# EAGLE board spi-interface-TFML (EAGLE 6.5.0)
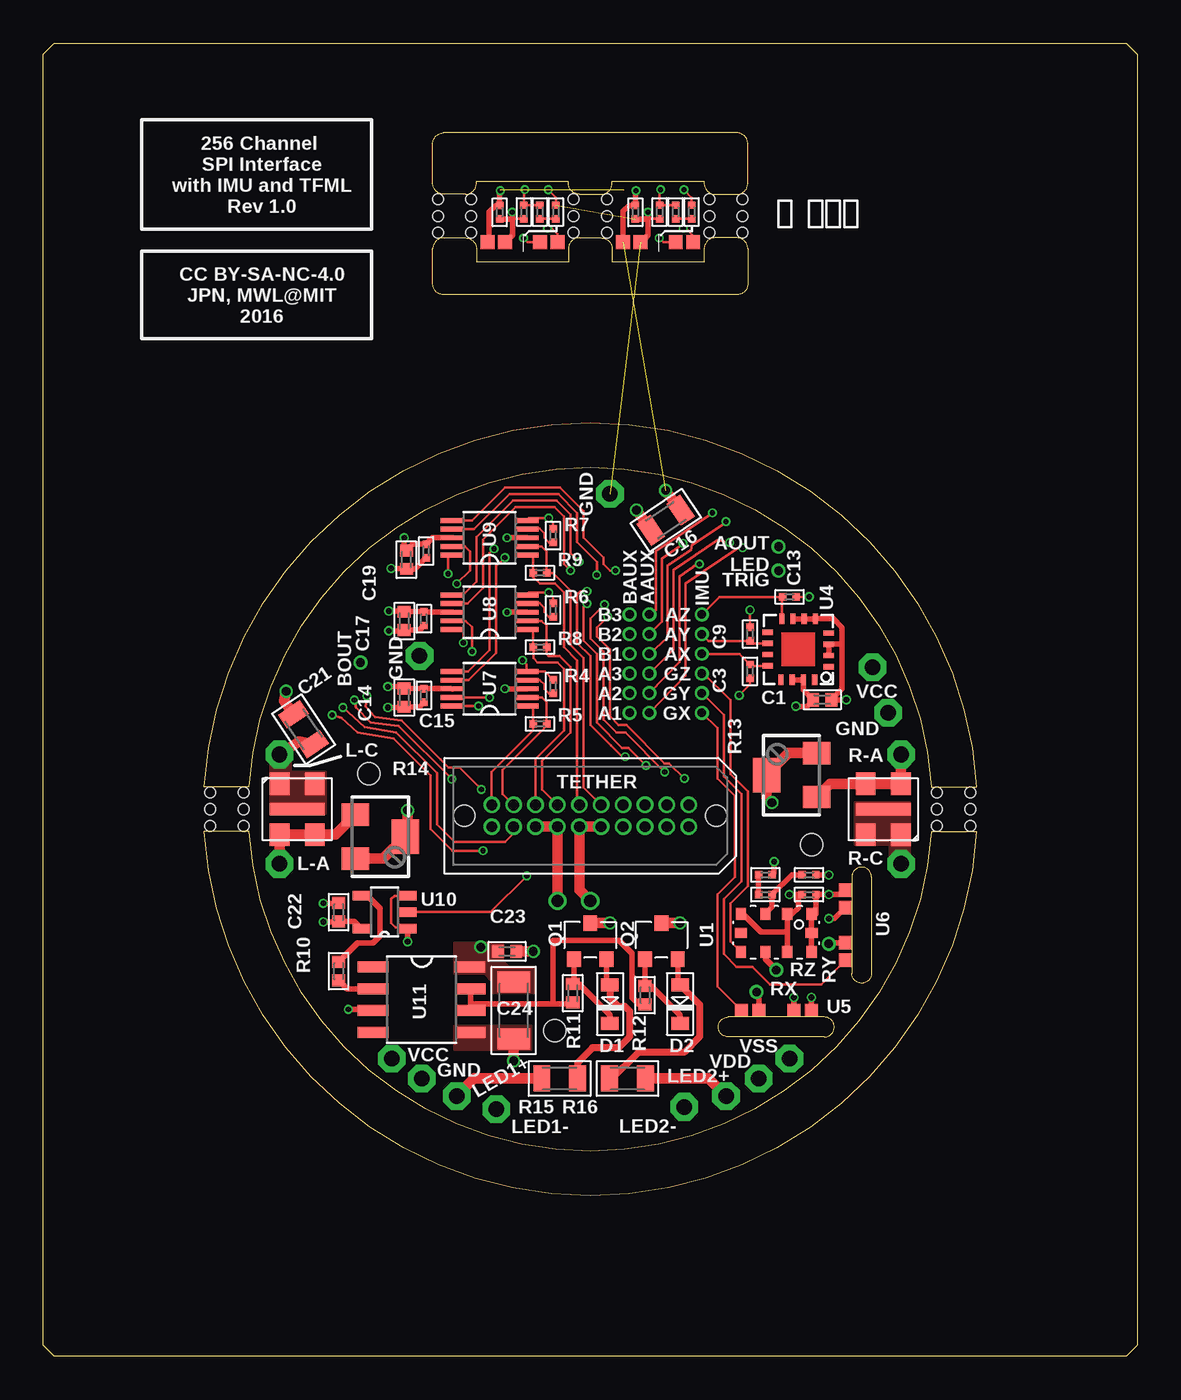
[diagram p0: board, top side]
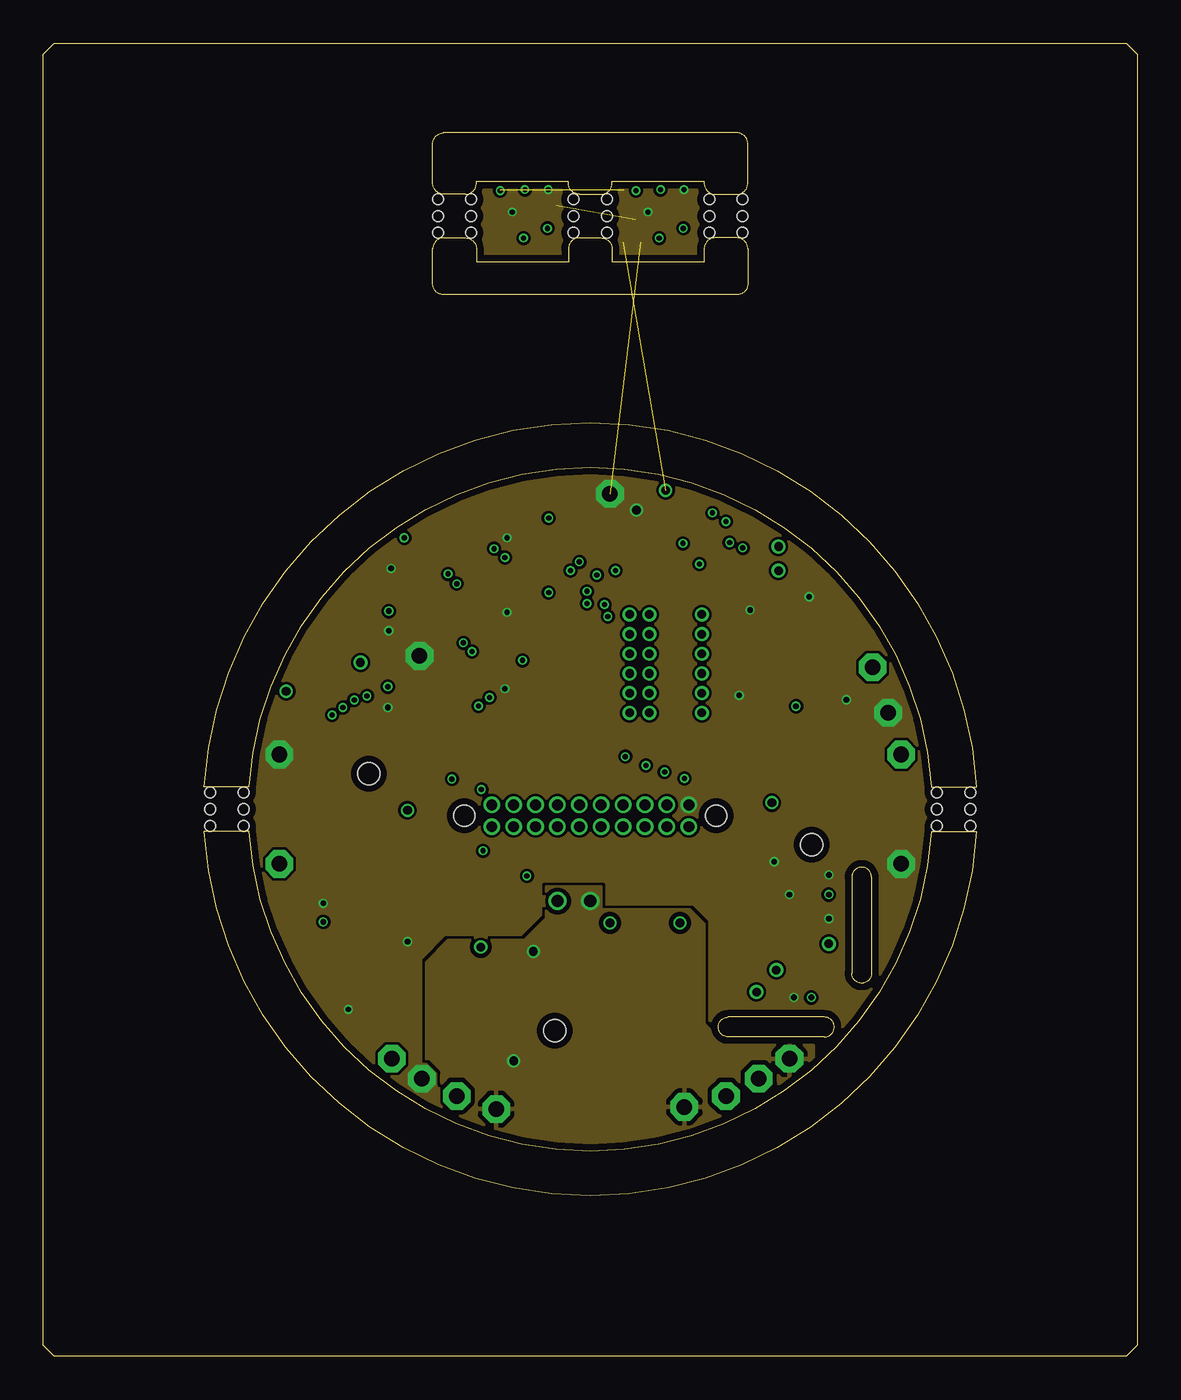
[diagram p1: board, inner layer Route2]
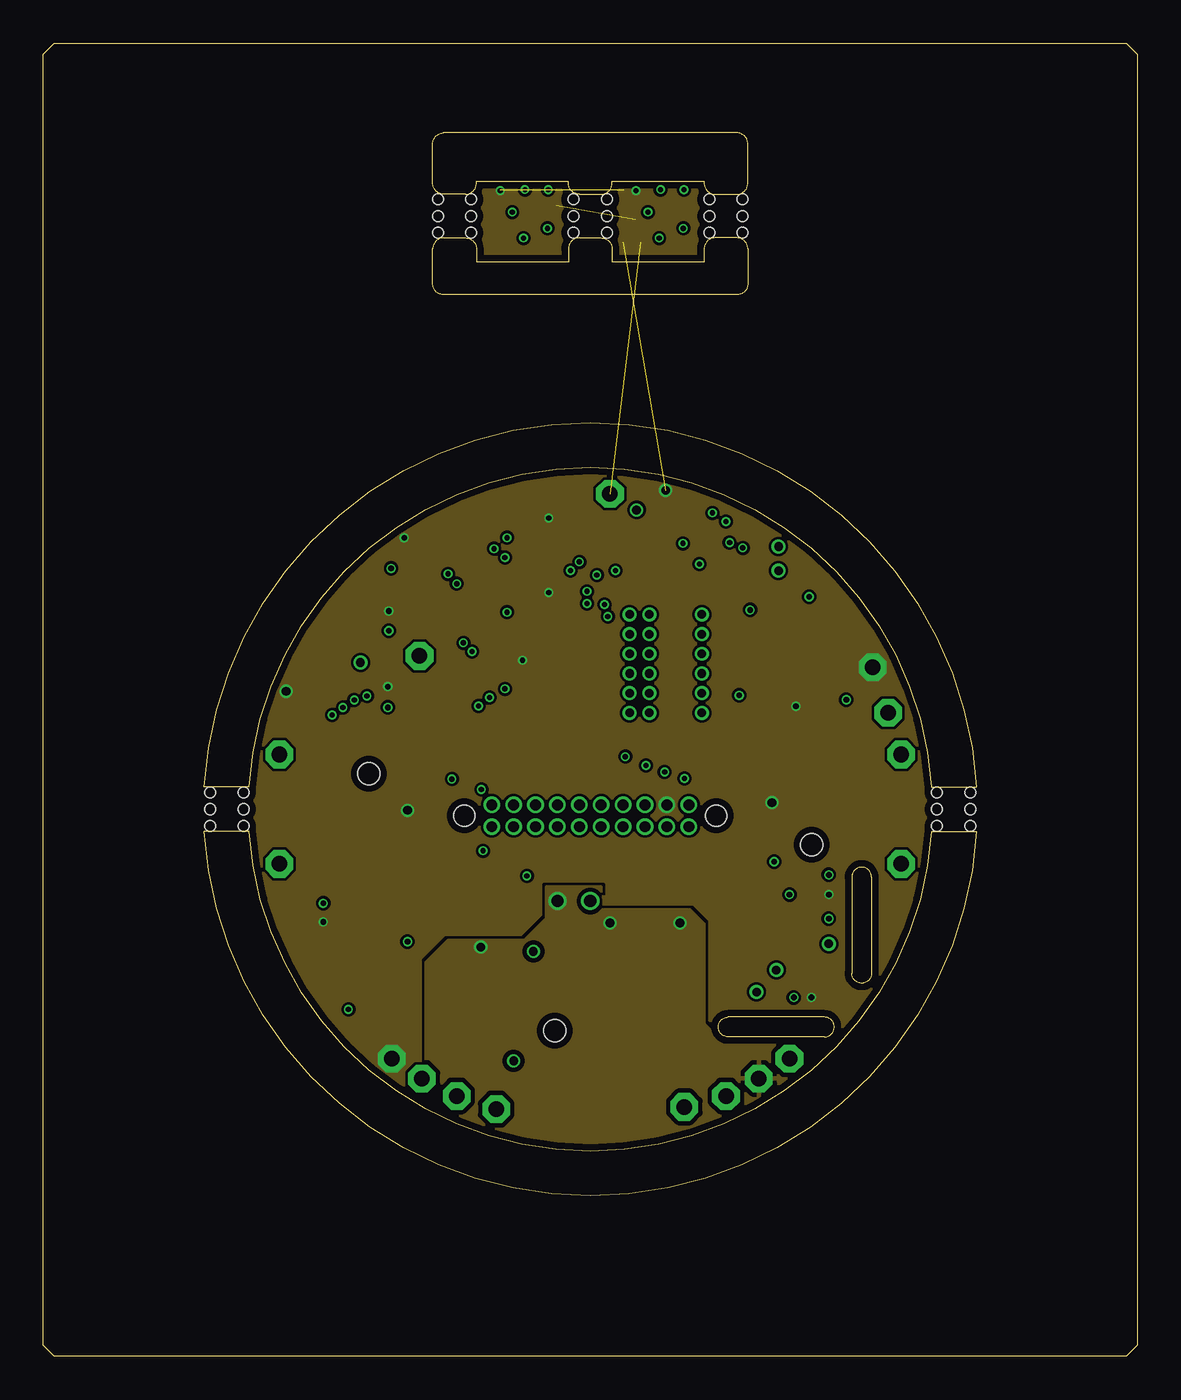
[diagram p2: board, inner layer Route15]
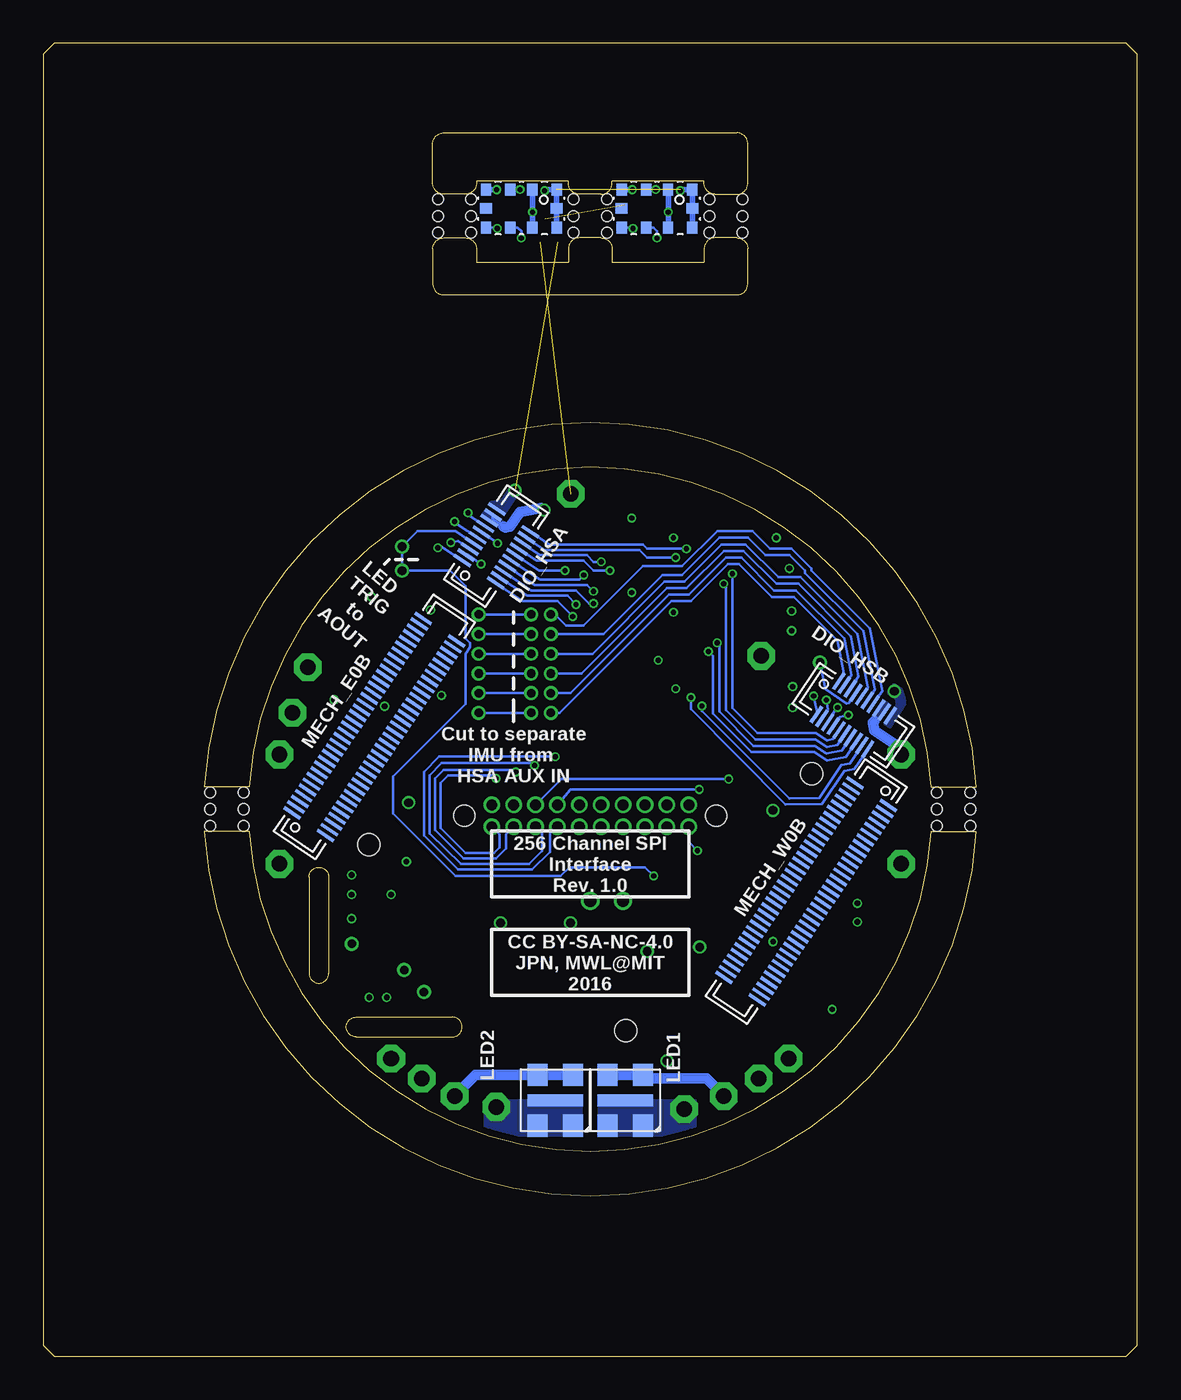
[diagram p3: board, bottom side, seen from below]

Size 63.5 x 76.2 mm. Coordinates in mm from the lower left corner, seen from the top.
Outline: 23.24,64.9 24.51,64.9 arc-90 25.15,64.26 25.15,63.5 30.48,63.5 30.48,64.26 arc-90 31.11,64.9 32.38,64.9 arc-90 33.02,64.26 33.02,63.5 38.35,63.5 38.35,64.26 arc-90 38.99,64.9 40.26,64.9 arc-90 40.89,64.26 40.89,62.23 arc-90 40.26,61.59 23.24,61.59 arc-90 22.61,62.23 22.61,64.26 arc-90 23.24,64.9
Outline: 24.51,67.44 23.24,67.44 arc-90 22.61,68.07 22.61,70.36 arc-90 23.24,70.99 40.26,70.99 arc-90 40.89,70.36 40.89,68.07 arc-90 40.26,67.44 38.99,67.44 arc-90 38.35,68.07 38.35,68.2 33.02,68.2 33.02,68.07 arc-90 32.38,67.44 31.11,67.44 arc-90 30.48,68.07 30.48,68.2 25.15,68.2 25.15,68.07 arc-90 24.51,67.44
Outline: 62.86,0 0.64,0 0,0.64 0,75.56 0.64,76.2 62.86,76.2 63.5,75.56 63.5,0.64 62.86,0
Outline: 11.95,33.05 arc-172 51.55,33.05 54.15,33.05 arc173 9.35,33.05 11.95,33.05
Outline: 11.95,30.45 9.35,30.45 arc173 54.15,30.45 51.55,30.45 arc-172 11.95,30.45
Copper layers (1*2*15*16): Top 0.035mm / dielectric 0.2mm / Route2 0.0175mm / dielectric 0.3mm / Route15 0.0175mm / dielectric 0.2mm / Bottom 0.035mm
Design rules "seeed-studio-4-layer": minimum track width 6mil, minimum drill 0.3mm, track to track 6mil, track to pad 6mil, pad to pad 6mil, via to via 6mil, smd to smd 0mil, copper to edge 0.4mm, drill to drill 10mil, minimum pad ring 6mil, minimum via ring 4mil, stop-mask expansion 4mil, vias tented up to drill 100mil, thermal gap 10mil
Net classes: 1 thick: width 0.102 mm
Holes 1.27 mm at 44.6,29.69 29.69,18.9 18.9,33.81
Holes 0.6 mm at 24.84,67.13 24.84,66.17 24.84,65.2 22.91,67.13 22.91,66.17 22.91,65.2 32.72,67.13 32.72,66.17 32.72,65.2 30.78,67.13 30.78,66.17 30.78,65.2 40.59,67.13 40.59,66.17 40.59,65.2 38.66,67.13 38.66,66.17 38.66,65.2 11.63,32.72 11.63,31.75 11.63,30.78 9.7,32.72 9.7,31.75 9.7,30.78 51.87,30.78 51.87,31.75 51.87,32.72 53.8,30.78 53.8,31.75 53.8,32.72

## Footprints (pad centres in the part's own frame; a part is rotated, then mirrored left to right if it is on the bottom)
TESTPOINT_0.5MM = drill 0.5: 1 0,0
0402 = smd 0.686 x 0.762: 1 -0.533,0; 2 0.533,0
0201 = smd 0.432 x 0.432: 1 -0.394,0; 2 0.394,0
0805 = smd 0.965 x 1.524: 1 -1.041,0; 2 1.041,0
1206 = smd 1.219 x 1.88: 1 -1.651,0; 2 1.651,0
SOD-323 = smd 0.762 x 1.016: A -1.118,0; C 1.118,0
DF40-20REC = smd 0.2 x 1.14: 1 -1.8,1.17; 2 -1.4,1.17; 3 -1,1.17; 4 -0.6,1.17; 5 -0.2,1.17; 6 0.2,1.17; 7 0.6,1.17; 8 1,1.17; 9 1.4,1.17; 10 1.8,1.17; 11 1.8,-1.17; 12 1.4,-1.17; 13 1,-1.17; 14 0.6,-1.17; 15 0.2,-1.17; 16 -0.2,-1.17; 17 -0.6,-1.17; 18 -1,-1.17; 19 -1.4,-1.17; 20 -1.8,-1.17
TESTPOINT_SMALL = drill 0.9 pad 1.6 octagon: 1 0,0
LED-MLE = smd 1.3 x 1.15: A1 -1.475,1.025; A2 -1.475,-1.025; C1 1.475,1.025; C2 1.475,-1.025 | smd 0.7 x 3.2: HS 0,0
DF40-70REC = smd 0.2 x 1.14: 1 -6.8,1.17; 2 -6.4,1.17; 3 -6,1.17; 4 -5.6,1.17; 5 -5.2,1.17; 6 -4.8,1.17; 7 -4.4,1.17; 8 -4,1.17; 9 -3.6,1.17; 10 -3.2,1.17; 11 -2.8,1.17; 12 -2.4,1.17; 13 -2,1.17; 14 -1.6,1.17; 15 -1.2,1.17; 16 -0.8,1.17; 17 -0.4,1.17; 18 0,1.17; 19 0.4,1.17; 20 0.8,1.17; 21 1.2,1.17; 22 1.6,1.17; 23 2,1.17; 24 2.4,1.17; 25 2.8,1.17; 26 3.2,1.17; 27 3.6,1.17; 28 4,1.17; 29 4.4,1.17; 30 4.8,1.17; 31 5.2,1.17; 32 5.6,1.17; 33 6,1.17; 34 6.4,1.17; 35 6.8,1.17; 36 6.8,-1.17; 37 6.4,-1.17; 38 6,-1.17; 39 5.6,-1.17; 40 5.2,-1.17; 41 4.8,-1.17; 42 4.4,-1.17; 43 4,-1.17; 44 3.6,-1.17; 45 3.2,-1.17; 46 2.8,-1.17; 47 2.4,-1.17; 48 2,-1.17; 49 1.6,-1.17; 50 1.2,-1.17; 51 0.8,-1.17; 52 0.4,-1.17; 53 0,-1.17; 54 -0.4,-1.17; 55 -0.8,-1.17; 56 -1.2,-1.17; 57 -1.6,-1.17; 58 -2,-1.17; 59 -2.4,-1.17; 60 -2.8,-1.17; 61 -3.2,-1.17; 62 -3.6,-1.17; 63 -4,-1.17; 64 -4.4,-1.17; 65 -4.8,-1.17; 66 -5.2,-1.17; 67 -5.6,-1.17; 68 -6,-1.17; 69 -6.4,-1.17; 70 -6.8,-1.17
SOT23-GSD = smd 0.8 x 0.9: D 0,0; G -0.95,-2.1; S 0.95,-2.1
SM-42/43W = smd 1.3 x 1.6: 1 -1.27,-1.45; 3 1.27,-1.45 | smd 2 x 1.6: 2 0,1.45
TFML-110-01-2-D-LC = drill 0.635 pad 0.965: 1 -5.715,-0.635; 2 -4.445,-0.635; 3 -3.175,-0.635; 4 -1.905,-0.635; 5 -0.635,-0.635; 6 0.635,-0.635; 7 1.905,-0.635; 8 3.175,-0.635; 9 4.445,-0.635; 10 5.715,-0.635; 11 5.715,0.635; 12 4.445,0.635; 13 3.175,0.635; 14 1.905,0.635; 15 0.635,0.635; 16 -0.635,0.635; 17 -1.905,0.635; 18 -3.175,0.635; 19 -4.445,0.635; 20 -5.715,0.635 | hole 1.194: -7.303,0; 7.303,0
TP08SQ = smd 0.8 x 0.8: TP 0,0
LGA-10-COMPACT = smd 0.6 x 0.7: 1 2.05,1.1; 2 0.635,1.1; 3 -0.635,1.1; 4 -2.05,1.1; 6 -2.05,-1.1; 7 -0.635,-1.1; 8 0.635,-1.1; 9 2.05,-1.1 | smd 0.7 x 0.6: 5 -2.05,0; 10 2.05,0
ADXL335 = smd 0.61 x 0.305: COM1 -1.775,-0.3; NC1 -1.775,1; NC2 -1.775,-0.95; NC3 1.775,-1; NC4 1.775,0.3; ST -1.775,0.35; XOUT 1.775,0.95; YOUT 1.775,-0.35 | smd 0.305 x 0.61: COM2 -1,-1.775; COM3 -0.35,-1.775; COM4 0.3,-1.775; NC5 1,1.775; NC6 -0.95,1.775; VS1 0.35,1.775; VS2 -0.3,1.775; ZOUT 0.95,-1.775
LY3200-VERT-MODULE = smd 0.762 x 0.762: GND 0.381,-1.016; OUT 0.381,2.032; REF 0.381,1.016; VCC 0.381,-2.032
10-UMAX = smd 1.4 x 0.28: 1 -2.14,1; 2 -2.14,0.5; 3 -2.14,0; 4 -2.14,-0.5; 5 -2.14,-1; 6 2.14,-1; 7 2.14,-0.5; 8 2.14,0; 9 2.14,0.5; 10 2.14,1
SOT-23-5 = smd 0.55 x 1: 1 -0.95,-1.35; 2 0,-1.35; 3 0.95,-1.35; 4 0.95,1.35; 5 -0.95,1.35
SOIC127P500X400-8N = smd 1.778 x 0.635: 1 -2.819,1.905; 2 -2.819,0.635; 3 -2.819,-0.635; 4 -2.819,-1.905; 5 2.819,-1.905; 6 2.819,-0.635; 7 2.819,0.635; 8 2.794,1.905

## Placement (x,y rotation side)
AA1  [TESTPOINT_0.5MM]  35.18,37.34 0 top
AA2  [TESTPOINT_0.5MM]  35.18,38.48 0 top
AA3  [TESTPOINT_0.5MM]  35.18,39.62 0 top
AB1  [TESTPOINT_0.5MM]  35.18,40.77 0 top
AB2  [TESTPOINT_0.5MM]  35.18,41.91 0 top
AB3  [TESTPOINT_0.5MM]  35.18,43.05 0 top
AOUT  [TESTPOINT_0.5MM]  42.67,46.99 0 top
AX  [TESTPOINT_0.5MM]  38.23,40.77 0 top
AY  [TESTPOINT_0.5MM]  38.23,41.91 0 top
AZ  [TESTPOINT_0.5MM]  38.23,43.05 0 top
BA1  [TESTPOINT_0.5MM]  34.04,37.34 270 top
BA2  [TESTPOINT_0.5MM]  34.04,38.48 270 top
BA3  [TESTPOINT_0.5MM]  34.04,39.62 270 top
BB1  [TESTPOINT_0.5MM]  34.04,40.77 270 top
BB2  [TESTPOINT_0.5MM]  34.04,41.91 270 top
BB3  [TESTPOINT_0.5MM]  34.04,43.05 270 top
BOUT  [TESTPOINT_0.5MM]  18.42,40.26 270 top
C1  .1uF  [0402]  45.21,38.1 0 top
C2  470nF  [0201]  44.45,26.8 180 top
C3  .1uF  [0201]  41.02,39.75 90 top
C4  470nF  [0201]  26.49,66.38 270 top
C5  470nF  [0201]  34.37,66.38 270 top
C6  10nF  [0201]  44.45,27.94 0 top
C7  10nF  [0201]  27.9,66.4 270 top
C8  10nF  [0201]  35.78,66.4 270 top
C9  .1uF  [0201]  41.02,41.91 270 top
C10  470nF  [0201]  41.91,26.8 180 top
C11  470nF  [0201]  28.83,66.4 270 top
C12  470nF  [0201]  36.71,66.4 270 top
C13  .1uF  [0201]  43.31,44.07 180 top
C14  0.1uF  [0402]  20.96,38.23 270 top
C15  1nF  [0201]  22.1,38.35 270 top
C16  10uF  [0805]  36.13,48.51 34 top
C17  0.1uF  [0402]  20.96,42.67 270 top
C18  1nF  [0201]  22.1,42.8 270 top
C19  0.1uF  [0402]  21.08,46.23 270 top
C20  1nF  [0201]  22.23,46.74 270 top
C21  10uF  [0805]  15.11,36.39 124 top
C22  0.1uF  [0402]  17.15,25.78 90 top
C23  0.1uF  [0402]  26.92,23.5 180 top
C24  47uF  [1206]  27.31,20.07 270 top
D1  PDZ10B  [SOD-323]  32.89,20.45 270 top
D2  PDZ10B,115  [SOD-323]  36.96,20.45 270 top
DIO_HSA  [DF40-20REC]  37.2,47.01 56 bottom
DIO_HSB  [DF40-20REC]  16.49,37.2 326 bottom
GX  [TESTPOINT_0.5MM]  38.23,37.34 0 top
GY  [TESTPOINT_0.5MM]  38.23,38.48 0 top
GZ  [TESTPOINT_0.5MM]  38.23,39.62 0 top
L-A  [TESTPOINT_SMALL]  13.72,28.57 0 top
L-C  [TESTPOINT_SMALL]  13.72,34.92 0 top
LED1  MLE  [LED-MLE]  29.72,14.86 270 bottom
LED1+  [TESTPOINT_SMALL]  24,15.11 180 top
LED1-  [TESTPOINT_SMALL]  26.29,14.35 180 top
LED2  MLE  [LED-MLE]  33.78,14.86 270 bottom
LED2+  [TESTPOINT_SMALL]  39.62,15.11 180 top
LED2-  [TESTPOINT_SMALL]  37.21,14.48 180 top
LED_TRIG  [TESTPOINT_0.5MM]  42.67,45.59 0 top
LEFT  MLE-T01  [LED-MLE]  14.75,31.75 90 top
MECH_E0B  [DF40-70REC]  44.28,36.52 56 bottom
MECH_W0B  [DF40-70REC]  19.22,26.98 236 bottom
Q1  AO3402  [SOT23-GSD]  31.75,25.15 0 top
Q2  AO3402  [SOT23-GSD]  35.88,25.15 0 top
R1  10k  [0201]  41.91,27.94 0 top
R2  10k  [0201]  29.76,66.4 90 top
R3  10k  [0201]  37.63,66.4 90 top
R4  0  [0201]  29.59,38.86 270 top
R5  100  [0201]  28.83,36.7 180 top
R6  0  [0201]  29.59,43.31 270 top
R7  0  [0201]  29.59,47.62 270 top
R8  100  [0201]  28.83,41.15 180 top
R9  100  [0201]  28.83,45.47 180 top
R10  300  [0402]  17.15,22.35 270 top
R11  10  [0402]  30.73,21.08 90 top
R12  10  [0402]  34.92,20.96 90 top
R13  20k  [SM-42/43W]  43.43,33.73 90 top
R14  20k  [SM-42/43W]  19.56,30.15 270 top
R15  24,1W  [0805]  29.97,16.13 0 top
R16  24,1W  [0805]  33.91,16.13 180 top
R-A  [TESTPOINT_SMALL]  49.78,34.92 0 top
R-C  [TESTPOINT_SMALL]  49.78,28.58 0 top
RIGHT  MLE-V01  [LED-MLE]  48.75,31.75 270 top
RX  [TESTPOINT_0.5MM]  41.4,21.15 0 top
RY  [TESTPOINT_0.5MM]  45.59,23.94 0 top
RZ  [TESTPOINT_0.5MM]  42.54,22.42 0 top
TETHER  TFML-110-01-S-D-LC  [TFML-110-01-2-D-LC]  31.75,31.37 0 top
TP1  [TP08SQ]  25.78,64.64 0 top
TP2  [TP08SQ]  29.85,64.64 0 top
TP3  [TP08SQ]  33.65,64.64 0 top
TP4  [TP08SQ]  37.72,64.64 0 top
TP5  [TP08SQ]  28.83,64.64 0 top
TP6  [TP08SQ]  36.7,64.64 0 top
TP7  [TP08SQ]  26.8,64.64 0 top
TP8  [TP08SQ]  34.67,64.64 0 top
TP9  [TESTPOINT_SMALL]  20.24,17.27 0 top
TP10  [TESTPOINT_SMALL]  48.13,39.99 0 top
TP11  [TESTPOINT_SMALL]  21.97,16.12 0 top
TP12  [TESTPOINT_SMALL]  49.03,37.34 0 top
TP13  [TESTPOINT_SMALL]  32.89,50.04 0 top
TP14  [TESTPOINT_SMALL]  21.84,40.64 0 top
TP15  [TESTPOINT_SMALL]  41.53,16.13 0 top
TP16  [TESTPOINT_SMALL]  43.31,17.27 0 top
U1  LY3200  [LGA-10-COMPACT]  42.54,24.57 0 top
U2  LY3200  [LGA-10-COMPACT]  27.88,66.6 0 bottom
U3  LY3200  [LGA-10-COMPACT]  35.75,66.6 0 bottom
U4  ADXL335  [ADXL335]  43.81,41.02 180 top
U5  [LY3200-VERT-MODULE]  42.54,19.69 90 top
U6  [LY3200-VERT-MODULE]  46.93,25.02 180 top
U7  MAX9174  [10-UMAX]  25.91,38.73 180 top
U8  MAX9174  [10-UMAX]  25.91,43.18 180 top
U9  MAX9174  [10-UMAX]  25.91,47.5 180 top
U10  NC7SZ  [SOT-23-5]  19.81,25.78 90 top
U11  SI822X  [SOIC127P500X400-8N]  21.97,20.7 0 top

## Library data of the parts
AA1-AA3 AB1-AB3 AOUT AX AY AZ BA1-BA3 BB1-BB3 BOUT C2-C15 C17-C20 C22-C24 D1 D2 DIO_HSA DIO_HSB GX GY GZ L-A L-C LED1 LED1+ LED1- LED2 LED2+ LED2- LED_TRIG LEFT MECH_E0B MECH_W0B Q1 Q2 R1-R16 R-A R-C RIGHT RX RY RZ TETHER TP1-TP16 U1-U11 = jonnew
C1 = headstage
C16 C21 = headstage; MN: TDK Corp.; PARTNO: C2012X5R1Cxxxxxxx; VID: DK

## Nets
AUXIN1_HSA_A: AA1.1 DIO_HSA.1
AUXIN1_HSA_B: AB1.1 DIO_HSA.5
AUXIN1_HSB_A: BA1.1 DIO_HSB.1
AUXIN1_HSB_B: BB1.1 DIO_HSB.5
AUXIN2_HSA_A: AA2.1 DIO_HSA.2
AUXIN2_HSA_B: AB2.1 DIO_HSA.6
AUXIN2_HSB_A: BA2.1 DIO_HSB.2
AUXIN2_HSB_B: BB2.1 DIO_HSB.6
AUXIN3_HSA_A: AA3.1 DIO_HSA.3
AUXIN3_HSA_B: AB3.1 DIO_HSA.7
AUXIN3_HSB_A: BA3.1 DIO_HSB.3
AUXIN3_HSB_B: BB3.1 DIO_HSB.7
AUXOUT_HSA_B: AOUT.1 DIO_HSA.4
AUXOUT_HSB_B: BOUT.1 DIO_HSB.4
CS+: R5.2 TETHER.20 U7.1
CS+_HSA: DIO_HSA.12 U7.7
CS+_HSB: DIO_HSB.12 U7.10
CS-: R5.1 TETHER.19 U7.2
CS-_HSA: DIO_HSA.11 U7.6
CS-_HSB: DIO_HSB.11 U7.9
GND: C1.2 C2.2 C3.1 C4.2 C5.2 C6.2 C7.2 C8.2 C9.1 C13.1 C14.2 C15.2 C16.1 C17.2 C18.2 C19.2 C20.2 C21.1 C22.2 DIO_HSA.8 DIO_HSA.9 DIO_HSB.8 DIO_HSB.9 L-C.1 LEFT.C1 LEFT.C2 LEFT.HS R1.2 R2.2 R3.2 R-C.1 RIGHT.C1 RIGHT.C2 RIGHT.HS TETHER.11 TP7.TP TP8.TP TP11.1 TP12.1 TP13.1 TP14.1 U1.2 U1.4 U1.8 U2.2 U2.4 U2.8 U3.2 U3.4 U3.8 U4.COM1 U4.COM2 U4.COM3 U4.COM4 U4.ST U5.GND U6.GND U7.3 U8.3 U9.3 U10.1 U10.3 U11.3
MISO1+: DIO_HSA.18 TETHER.8
MISO1-: DIO_HSA.17 TETHER.7
MISO2+: DIO_HSA.20 TETHER.10
MISO2-: DIO_HSA.19 TETHER.9
MISO3+: DIO_HSB.18 TETHER.2
MISO3-: DIO_HSB.17 TETHER.1
MISO4+: DIO_HSB.20 TETHER.14
MISO4-: DIO_HSB.19 TETHER.13
MOSI+: R9.2 TETHER.16 U9.1
MOSI+_HSA: DIO_HSA.16 U9.7
MOSI+_HSB: DIO_HSB.16 U9.10
MOSI-: R9.1 TETHER.15 U9.2
MOSI-_HSA: DIO_HSA.15 U9.6
MOSI-_HSB: DIO_HSB.15 U9.9
N$1: R10.2 U11.2
N$2: C7.1 C11.1 U2.3
N$3: LED1+.1 LED1.A1 LED1.A2 R15.1
N$4: D1.A Q1.S R15.2
N$5: LED_TRIG.1 U10.2
N$6: R10.1 U10.4
N$7: D2.C Q2.G R12.2
N$8: C11.2 R2.1
N$9: R13.1 R-A.1 RIGHT.A1 RIGHT.A2
N$10: C8.1 C12.1 U3.3
N$11: D2.A Q2.S R16.2
N$12: LED2+.1 LED2.A1 LED2.A2 R16.1
N$13: L-A.1 LEFT.A1 LEFT.A2 R14.1
N$14: C12.2 R3.1
N$15: C6.1 C10.1 U1.3
N$16: C10.2 R1.1
N$17: R4.2 U7.4
N$18: R7.2 U9.4
N$19: R6.2 U8.4
N$20: D1.C Q1.G R11.2
N$22: R11.1 R12.1 U11.6 U11.7
OUT_GX: TP2.TP U2.6
OUT_GY: TP4.TP U3.6
OUTX: GX.1 U5.OUT
OUTY: GY.1 U6.OUT
OUTZ: GZ.1 U1.6
REFX: RX.1 U5.REF
REFY: RY.1 U6.REF
SCLK+: R8.2 TETHER.18 U8.1
SCLK+_HSA: DIO_HSA.14 U8.7
SCLK+_HSB: DIO_HSB.14 U8.10
SCLK-: R8.1 TETHER.17 U8.2
SCLK-_HSA: DIO_HSA.13 U8.6
SCLK-_HSB: DIO_HSB.13 U8.9
VCC: C1.1 C2.1 C4.1 C5.1 C14.1 C15.1 C16.2 C17.1 C18.1 C19.1 C20.1 C21.2 C22.1 DIO_HSA.10 DIO_HSB.10 R4.1 R6.1 R7.1 R13.2 R13.3 R14.2 R14.3 TETHER.12 TP1.TP TP3.TP TP9.1 TP10.1 U1.1 U1.9 U1.10 U2.1 U2.9 U2.10 U3.1 U3.9 U3.10 U4.VS1 U4.VS2 U5.VCC U6.VCC U7.5 U7.8 U8.5 U8.8 U9.5 U9.8 U10.5
VDD: C23.2 C24.1 Q1.D Q2.D TETHER.3 TETHER.4 TP15.1 U11.8
VREF_GX: TP5.TP U2.7
VREF_GY: TP6.TP U3.7
VREFZ: RZ.1 U1.7
VSS: C23.1 C24.2 LED1-.1 LED1.C1 LED1.C2 LED1.HS LED2-.1 LED2.C1 LED2.C2 LED2.HS TETHER.5 TETHER.6 TP16.1 U11.5
XOUT1: AX.1 C3.2 U4.XOUT
YOUT1: AY.1 C9.2 U4.YOUT
ZOUT1: AZ.1 C13.2 U4.ZOUT

## Tracks (layer width: path | path; a pad name or v marks a point on that pad's centre or on a via)
AUXIN1_HSA_A  (via drill 0.3)
  Top 0.152: AA1.1 37.27,39.5 37.27,44.83 40.42,46.95 v40.6,46.91
  Bottom 0.152: DIO_HSA.1 40.35,46.96 v40.6,46.91
AUXIN1_HSA_B  (via drill 0.3)
  Top 0.152: AB1.1 36.24,41.7 36.24,45.88 37.6,46.8 37.66,47.07 39.61,48.39 v39.62,48.43
  Bottom 0.152: DIO_HSA.5 39.44,48.28 39.61,48.39 v39.62,48.43
AUXIN1_HSB_A
  Bottom 0.152: BA1.1 33.53,37.34 27.05,43.81 25.91,43.81 23.75,45.97 23.11,45.97 21.21,44.07 19.94,44.07 17.4,41.53 17.03,39.62 DIO_HSB.1
AUXIN1_HSB_B
  Bottom 0.152: BB1.1 31.62,40.77 27.43,44.96 26.29,44.96 24.13,47.12 22.73,47.12 20.83,45.21 19.56,45.21 16.26,41.91 15.65,38.8 DIO_HSB.5
AUXIN2_HSA_A  (via drill 0.3)
  Top 0.152: AA2.1 36.92,40.29 36.92,45.26 38.01,45.99 v38.08,45.98
  Bottom 0.152: DIO_HSA.2 38.88,46.52 v38.08,45.98
AUXIN2_HSA_B  (via drill 0.3)
  Top 0.152: AB2.1 35.9,42.63 35.9,46.3 37.12,47.12 v37.13,47.17
  Bottom 0.152: DIO_HSA.6 37.13,47.2 v37.13,47.17
AUXIN2_HSB_A
  Bottom 0.152: BA2.1 32.89,38.48 27.18,44.2 26.04,44.2 23.88,46.36 22.99,46.36 21.08,44.45 19.81,44.45 17.02,41.66 16.61,39.54 DIO_HSB.2
AUXIN2_HSB_B
  Bottom 0.152: BB2.1 30.99,41.91 27.56,45.34 26.42,45.34 24.26,47.5 22.61,47.5 21.59,46.48 20.19,46.48 19.3,45.59 19.3,45.47 15.9,42.09 15.24,38.7 DIO_HSB.6
AUXIN3_HSA_A  (via drill 0.3)
  Top 0.152: AA3.1 36.57,41.01 36.57,45.63 39.12,47.35 v39.84,47.21
  Bottom 0.152: DIO_HSA.3 39.42,47.3 v39.84,47.21
AUXIN3_HSA_B  (via drill 0.3)
  Top 0.152: AB3.1 35.31,43.05 35.56,43.31 35.56,46.74 35.57,46.73 v38.84,48.94 | v38.84,48.94
  Bottom 0.152: DIO_HSA.7 38.82,48.82 v38.84,48.94
AUXIN3_HSB_A
  Bottom 0.152: BA3.1 32.26,39.62 27.3,44.58 26.16,44.58 24,46.74 22.86,46.74 20.95,44.83 19.69,44.83 16.64,41.78 16.18,39.45 DIO_HSB.3
AUXIN3_HSB_B
  Bottom 0.152: BB3.1 33.78,43.05 33.15,42.42 32.13,42.42 28.7,45.85 26.42,45.85 24.38,47.88 22.35,47.88 21.34,46.86 20.07,46.86 18.92,45.72 18.92,45.59 15.52,42.22 14.82,38.62 DIO_HSB.7
AUXOUT_HSA_B
  Bottom 0.152: DIO_HSA.4 39.58,47.89 41.78,47.89 AOUT.1
AUXOUT_HSB_B
  Bottom 0.152: DIO_HSB.4 16.73,37.92 16.89,37.89 18.12,38.71 BOUT.1
CS+
  Top 0.152: 28.18,37.71 U7.1 28.43,37.73 R5.2 28.43,36.31 26.04,33.91 TETHER.20
CS+_HSA  (via drill 0.3)
  Top 0.152: U7.7 24.7,39.23 26.29,40.82 26.29,45.85 v26.8,46.36
  Bottom 0.152: DIO_HSA.12 35.45,47.49 34.42,46.8 28.89,46.8 28.45,46.36 v26.8,46.36 | v26.8,46.36
CS+_HSB  (via drill 0.3)
  Top 0.152: U7.10 v25.27,37.73
  Bottom 0.152: v25.27,37.73 25.27,37.45 20.21,32.38 18.45,32.4 17.17,34.31 16.69,34.4 DIO_HSB.12
CS-
  Top 0.152: 28.17,38.23 U7.2 28.95,38.23 29.21,37.97 29.21,36.72 R5.1 29.22,36.59 26.67,34.04 26.67,32.64 TETHER.19
CS-_HSA  (via drill 0.3)
  Top 0.152: U7.6 24.66,39.73 25.91,40.98 25.91,46.61 v26.16,46.86
  Bottom 0.152: DIO_HSA.11 34.13,47.12 28.7,47.12 28.45,46.86 v26.16,46.86
CS-_HSB  (via drill 0.3)
  Top 0.152: U7.9 v25.91,38.23
  Bottom 0.152: v25.91,38.23 25.91,37.57 20.44,32.02 18.3,32.04 17,33.98 16.42,34.09 DIO_HSB.11
GND  (via drill 0.3, 0.33, 0.51)  (2 unrouted)
  Top 0.152: v27.23,66.39 v27.23,66.4 27.23,66.01 C7.2 | R2.2 29.76,67.24 v29.31,67.69 | v35.1,66.39 v35.1,66.4 35.1,66.01 C8.2 | R3.2 37.63,67.24 v37.18,67.69 | U10.3 20.38,26.73 20.19,26.54 20.19,25.15 20.45,24.89 21.1,24.89 U10.1 | v41.02,43.31 C9.1 | v44.45,44.07 | v44.45,44.07 C13.1 | v40.39,38.35 41.02,38.99 C3.1
  Top 0.305: TP7.TP 26.97,64.8 27.23,65.05 v27.23,66.4 27.23,65.99 C4.2 | TP8.TP 34.84,64.8 35.1,65.05 v35.1,66.4 35.1,65.99 C5.2 | C18.2 21.83,42.14 C17.2 20.93,42.14 20.89,42.1 v20.07,42.1 | v20.19,45.72 21.06,45.72 C19.2 21.58,45.7 C20.2 | C15.2 21.83,37.69 C14.2 20.92,37.66 v20,37.66 | v26.92,43.18 U8.3 | v26.8,38.73 U7.3 | v26.92,47.5 U9.3 | U10.1 21.15,24.82 v21.15,24.07 | v16.26,26.29 17.12,26.29 C22.2 | U11.3 19.15,20.13 v17.72,20.13 | U4.ST U4.COM1 46.36,41.32 | 46.36,41.32 46.36,38.71 C1.2 v46.61,38.1 | U4.COM4 U4.COM3 U4.COM2 | U4.COM2 | U1.4 40.62,25.68 41.66,24.64 43.18,24.64 | C2.2 44.12,26.8 | C2.2 v43.31,26.8 | R1.2 42.42,28.05 v42.42,28.7 | C6.2 v45.59,27.94 | U1.8 43.18,24.64 | 43.18,24.64 U1.2 43.45,25.68 43.81,26.04 43.81,26.8 C2.2 | U6.GND 45.91,25.4 v45.59,25.4 | v43.56,20.83 U5.GND | 46.36,41.32 46.36,42.29 45.85,42.8 U4.COM2 | U4.COM2
  Top 0.61: C21.1 14.85,35.69 L-C.1 | v34.44,49.11 35.23,47.94 C16.1
  Bottom 0.152: U2.4 | 27.24,66.8 v27.23,66.4 | U3.4 | 35.12,66.8 v35.1,66.4 | 36.77,48.16 37.34,48.54 arc90 DIO_HSA.9
  Bottom 0.305: U2.4 v29.31,67.69 | U2.8 27.23,65.5 v27.23,66.4 27.23,67.7 U2.2 | U3.4 v37.18,67.69 | U3.8 35.1,65.5 v35.1,66.4 35.1,67.7 U3.2
  Bottom 0.61: L-C.1 14.02,35.13 14.1,35.55 15.26,36.33 15.34,36.77 15.27,36.87 | v34.44,49.11 34.6,49.22 35.83,48.98 36.4,48.14 36.66,48.09 36.77,48.16
  pour Route2 (rank 2, no thermals): -1.27,-1.27 -1.27,77.47 64.77,77.47 64.77,-1.27
  pour Top (no thermals): 13.21,31.5 13.21,35.05 14.35,35.05 14.35,33.91 16.38,33.91 16.38,31.5
  pour Top (no thermals): 50.29,32.13 50.29,28.58 49.15,28.58 49.15,29.72 47.12,29.72 47.12,32.13
  pour Bottom (no thermals): 14.4,37.82 15.15,36.71 15.47,36.93 14.72,38.03
  pour Bottom (no thermals): 36.93,48.03 38.03,48.78 37.82,49.1 36.71,48.35
MISO1+  (via drill 0.3)
  Top 0.152: v31.56,43.69 31.37,43.5 31.37,41.53 32.13,40.77 32.13,36.77 33.59,35.31 33.97,35.31 v34.99,34.29
  Bottom 0.152: v31.56,43.69 31.81,43.69 32.58,44.45 35.18,44.45 DIO_HSA.18 | v34.99,34.29 34.99,34.42 40.39,34.42 41.09,33.72 41.09,30.35 39.24,28.57 35.31,28.57 34.54,29.34 34.54,30.35 TETHER.8
MISO1-  (via drill 0.3)
  Top 0.152: v31.56,44.39 31.18,44.39 30.99,44.2 30.99,41.4 31.75,40.64 31.75,36.64 32.96,35.43 33.59,34.8 v33.78,34.8
  Bottom 0.152: v31.56,44.39 31.94,44.77 34.99,44.77 36.56,45.83 DIO_HSA.17 | v33.78,34.8 40.51,34.8 41.4,33.91 41.4,30.23 39.43,28.26 35.12,28.26 34.1,29.27 34.1,30.35 TETHER.7
MISO2+  (via drill 0.3)
  Top 0.152: v32.77,42.93 32.13,42.29 32.13,41.78 32.89,41.02 32.89,37.15 33.4,36.64 33.84,36.64 36.07,34.42 36.32,34.42 v37.21,33.53
  Bottom 0.152: v32.77,42.93 33.66,43.81 35.69,43.81 DIO_HSA.20 | v37.21,33.53 37.21,33.72 40.01,33.72 40.45,33.27 40.45,30.67 38.99,29.21 37.34,29.21 37.02,29.53 37.02,30.29 TETHER.10
MISO2-  (via drill 0.3)
  Top 0.152: v36.07,33.91 33.78,36.2 33.27,36.2 32.51,36.96 32.51,40.89 31.75,41.66 31.75,42.8 v32.58,43.62 | v36.07,33.91 | v36.07,33.91
  Bottom 0.152: v32.58,43.62 33.08,44.13 35.43,44.13 DIO_HSA.19 | v36.07,33.91 36.07,34.04 40.26,34.04 40.77,33.53 40.77,30.54 39.12,28.89 37.21,28.89 36.64,29.46 36.64,30.29 TETHER.9
MISO3+  (via drill 0.3)
  Top 0.152: v17.39,37.65 18.65,36.53 20.49,36.21 22.86,33.85 22.86,30.86 23.88,29.84 26.8,29.84 27.3,30.35 TETHER.2
  Bottom 0.152: DIO_HSB.18 17.45,37.62 v17.39,37.65
MISO3-  (via drill 0.3)
  Top 0.152: v16.77,37.21 17.34,37.04 18.24,36.21 20.34,35.86 22.48,33.72 22.48,30.61 23.75,29.34 v25.53,29.34
  Bottom 0.152: DIO_HSB.17 17.26,37.11 v16.77,37.21 | v25.53,29.34 26.04,29.84 TETHER.1
MISO4+  (via drill 0.3)
  Top 0.152: v18.79,38.32 18.71,37.7 19.25,37.11 20.8,36.89 23.05,34.64 23.53,34.16 24.16,34.16 v25.43,32.89
  Bottom 0.152: DIO_HSB.20 18.57,37.34 v18.79,38.32 | TETHER.14 32.89,32.89 v25.43,32.89
MISO4-  (via drill 0.3)
  Top 0.152: v23.72,33.5 20.64,36.58 19.01,36.79 18.17,37.65 v18.05,38.08
  Bottom 0.152: DIO_HSB.19 17.96,37.53 v18.05,38.08 | TETHER.13 33.43,33.5 v23.72,33.5
MOSI+
  Top 0.152: U9.1 28.43,46.5 R9.2 28.43,45.23 28.83,44.83 29.72,44.83 30.23,44.32 30.23,41.15 30.99,40.39 30.99,36.2 30.99,32.13 TETHER.16
MOSI+_HSA  (via drill 0.3)
  Top 0.152: U9.7 25.02,48 27.06,50.04 29.9,50.04 30.99,48.95 30.99,47.24 32.13,46.1 v32.13,45.34
  Bottom 0.152: v32.13,45.34 32.38,45.09 34.67,45.09 34.99,45.27 DIO_HSA.16
MOSI+_HSB  (via drill 0.3)
  Top 0.152: 23.24,46.5 U9.10 23.49,46.5 v23.49,45.4
  Bottom 0.152: 17.31,36.32 DIO_HSB.16 17.67,35.81 18.03,35.74 18.66,36.17 22.04,36.17 23.49,37.62 v23.49,45.4
MOSI-
  Top 0.152: U9.2 28.92,47 29.21,46.71 R9.1 29.59,45.47 30.61,44.45 30.61,41.27 31.37,40.51 31.37,33.02 TETHER.15
MOSI-_HSA  (via drill 0.3)
  Top 0.152: U9.6 24.89,48.5 26.81,50.42 30,50.42 31.37,49.05 31.37,47.5 32.51,46.36 32.51,45.97 32.89,45.59 v33.21,45.59
  Bottom 0.152: v33.21,45.59 34.73,45.59 DIO_HSA.15
MOSI-_HSB  (via drill 0.3)
  Top 0.152: U9.9 23.66,46.99 24.48,46.99 24.77,46.71 24.77,45.59 v24,44.83
  Bottom 0.152: DIO_HSB.15 17.42,35.47 18.03,35.35 18.7,35.8 22.16,35.8 23.88,37.51 23.88,44.7 v24,44.83
N$1
  Top 0.305: R10.2 17.63,21.34 U11.2
N$2  (via drill 0.3)
  Top 0.152: v27.95,67.7 27.9,67.65 C7.1 C11.1
  Bottom 0.152: U2.3 v27.95,67.7
N$3
  Top 0.61: R15.1 25.02,16.13 LED1+.1
  Bottom 0.61: LED1.A2 LED1.A1 28.49,16.13 25.02,16.13 LED1+.1
N$4
  Top 0.305: Q1.S 32.7,21.56 D1.A
  Top 0.406: R15.2 31.01,17.04 31.88,17.91 33.4,17.91 34.04,18.54 34.04,20.04 33.76,20.32 33.4,20.32 32.89,20.83 D1.A
N$5  (via drill 0.3)
  Top 0.152: U10.2 22.99,25.78 25.97,25.78 v28.07,27.88
  Bottom 0.152: LED_TRIG.1 39.88,45.59 38.99,44.7 38.99,41.66 38.73,41.4 38.73,41.15 38.99,40.77 38.99,37.85 43.18,33.66 43.18,31.5 39.56,27.88 33.46,27.88 32.96,28.38 28.57,28.38 v28.07,27.88
N$6
  Top 0.305: U10.4 18.83,26.73 19.56,26.01 19.56,24.41 19.16,24 18.26,24 R10.1
N$7
  Top 0.305: Q2.G R12.2 35.28,21.49 36.96,19.81 D2.C
N$8
  Top 0.152: R2.1 C11.2
N$9
  Top 0.61: R13.1 45.65,33.23 RIGHT.A2 RIGHT.A1 R-A.1
N$10  (via drill 0.3)
  Top 0.152: v35.83,67.7 35.78,67.65 C8.1 C12.1
  Bottom 0.152: U3.3 v35.83,67.7
N$11
  Top 0.305: Q2.S 36.83,21.56 D2.A
  Top 0.406: D2.A 38.1,20.42 38.1,18.54 37.21,17.65 34.54,17.65 32.87,15.98 R16.2
N$12
  Top 0.61: R16.1 38.61,16.13 LED2+.1
  Bottom 0.61: LED2.A1 LED2.A2 38.4,16.33 LED2+.1
N$13
  Top 0.61: R14.1 16.96,30.27 LEFT.A2 LEFT.A1 L-A.1
N$14
  Top 0.152: R3.1 C12.2
N$15
  Top 0.305: C6.1 43.45,27.94 C10.1 42.3,26.07 U1.3
N$16
  Top 0.305: C10.2 R1.1
N$17
  Top 0.152: U7.4 28.07,39.26 28.82,39.26 29.08,38.99 29.08,38.73 29.35,38.47 R4.2
N$18
  Top 0.152: U9.4 28.07,48.02 28.82,48.02 29.08,47.75 29.08,47.5 29.35,47.23 R7.2
N$19
  Top 0.152: U8.4 28.07,43.7 28.82,43.7 29.08,43.43 29.08,43.18 29.35,42.91 R6.2
N$20
  Top 0.305: Q1.G 30.8,21.62 R11.2 31.09,21.62 32.89,19.81 D1.C
N$21
  Bottom 0.152: 35.18,43.05 38.23,43.05
N$22
  Top 0.305: 29.59,20.45 29.59,24.13 33.42,24.13 34.16,23.39 34.16,20.83 34.57,20.42 R12.1 | U11.7 24.79,20.45 | 24.79,20.45 U11.6 | R11.1 30.71,20.45 29.59,20.45 | 29.59,20.45 24.79,20.45
N$24
  Bottom 0.152: 35.18,41.91 38.23,41.91
N$25
  Bottom 0.152: 35.18,40.77 38.23,40.77
N$26
  Bottom 0.152: 35.18,39.62 38.23,39.62
N$27
  Bottom 0.152: 35.18,38.48 38.23,38.48
N$28
  Bottom 0.152: 35.18,37.34 38.23,37.34
N$30
  Bottom 0.152: 42.67,46.99 42.67,45.59
OUT_GX  (via drill 0.3)
  Top 0.152: v29.27,65.45 29.54,65.42 29.84,65.12 TP2.TP
  Bottom 0.152: 29.93,65.4 U2.6 29.35,65.5 v29.27,65.45
OUT_GY  (via drill 0.3)
  Top 0.152: 37.71,64.65 arc90 TP4.TP 37.72,65.02 37.32,65.42 v37.15,65.45
  Bottom 0.152: v37.15,65.45 37.23,65.5 U3.6
OUTX
  Top 0.152: U5.OUT 39.12,21.46 39.12,26.8 40.13,27.81 40.13,32.51 39.12,33.53 39.12,36.45 GX.1
OUTY
  Top 0.152: U6.OUT 45.15,21.59 42.16,21.59 41.15,22.61 40.24,22.61 39.5,23.35 39.5,26.54 40.51,27.56 40.51,32.64 39.5,33.66 39.5,37.21 GY.1
OUTZ
  Top 0.152: U1.6 39.88,24.09 39.88,26.29 40.89,27.3 40.89,32.77 39.88,33.78 39.88,38.07 38.33,39.62 GZ.1
REFX
  Top 0.305: RX.1 41.53,21.02 U5.REF
REFY
  Top 0.305: U6.REF 45.66,24 RY.1
SCLK+
  Top 0.152: U8.1 28.43,42.18 R8.2 28.45,41.13 28.45,40.51 28.7,40.26 29.84,40.26 30.23,39.88 30.23,36.32 28.57,34.67 TETHER.18
SCLK+_HSA  (via drill 0.3)
  Top 0.152: U8.7 24.63,43.68 25.53,44.58 25.53,47.39 27.41,49.28 29.69,49.28 30.23,48.74 30.23,45.97 v30.61,45.59
  Bottom 0.152: DIO_HSA.14 35.89,46.86 34.86,46.16 32.13,46.16 31.56,45.59 v30.61,45.59
SCLK+_HSB  (via drill 0.3)
  Top 0.152: U8.10 23.66,42.16 24.38,42.16 v24.38,41.4
  Bottom 0.152: v24.38,41.4 24.26,41.27 24.26,37.41 22.28,35.43 18.71,35.43 18.05,34.98 17.15,35.16 DIO_HSB.14
SCLK-
  Top 0.152: U8.2 28.92,42.68 29.21,42.39 R8.1 29.22,40.75 29.34,40.64 29.97,40.64 30.61,40.01 30.61,36.2 28.96,34.54 28.96,32.89 TETHER.17
SCLK-_HSA  (via drill 0.3)
  Top 0.152: U8.6 24.37,44.18 25.15,44.96 25.15,47.54 27.26,49.66 29.79,49.66 30.61,48.84 30.61,46.61 v31.11,46.1
  Bottom 0.152: v31.11,46.1 31.56,46.1 31.94,46.48 34.67,46.48 35.67,47.16 DIO_HSA.13
SCLK-_HSB  (via drill 0.3)
  Top 0.152: U8.9 24.53,42.68 24.89,42.31 v24.89,40.89
  Bottom 0.152: v24.89,40.89 24.64,40.64 24.64,37.3 22.4,35.06 18.74,35.06 18.01,34.57 16.92,34.78 DIO_HSB.13
VCC  (via drill 0.3, 0.33, 0.51)  (2 unrouted)
  Top 0.152: R7.1 29.59,48.39 v29.34,48.64 28.19,48.64 U9.5 | R6.1 29.59,44.07 v29.34,44.32 28.19,44.32 U8.5 | v27.81,40.39 28.05,40.15 U7.5 29.11,39.73 R4.1
  Top 0.305: v26.52,67.63 26.49,67.63 C4.1 26.24,66.78 25.88,66.41 25.88,64.74 TP1.TP | C5.1 34.37,67.63 v34.4,67.63 | C5.1 34.12,66.78 | TP3.TP 33.66,66.44 34,66.78 C5.1 | U8.8 23.64,43.19 C18.1 22.09,43.2 C17.1 20.93,43.2 20.89,43.24 v20.07,43.24 | U9.8 22.59,47.5 C20.1 21.45,47.13 C19.1 | C19.1 21.06,46.74 | U7.8 23.64,38.75 C15.1 22.09,38.76 C14.1 20.85,38.86 v20,38.86 | v16.26,25.21 17.11,25.21 C22.1 18.05,25.25 U10.5 | v20.95,47.5 20.95,46.89 arc90 C19.1 | v43.69,37.72 44.32,37.72 C1.1 44.12,38.66 U4.VS2 U4.VS1 | v45.59,26.8 | v45.59,26.8 C2.1 44.84,25.68 U1.1 U1.10 U1.9 | U6.VCC 46.29,26.8 v45.59,26.8 | v44.58,20.83 | v44.58,20.83 U5.VCC
  Top 0.61: R14.3 19.74,28.88 R14.2 21.14,30.29 v21.15,31.69 | R13.3 43.25,35 R13.2 41.98,32.44 v42.29,32.13 | C21.2 14,38.04 v14.11,38.59 | v36.12,50.25 C16.2
  Bottom 0.305: v26.52,67.63 26.52,67.7 U2.1 U2.10 U2.9 | v34.4,67.63 34.4,67.7 U3.1 U3.10 U3.9
  pour Route15 (rank 2, no thermals): -1.9,-1.9 -1.9,78.1 65.4,78.1 65.41,-1.91
  pour Bottom (no thermals): 14.05,37.66 14.69,36.71 14.38,36.5 13.45,37.87 13.61,38.66 14.13,39.02 14.49,38.49 14.02,38.17 13.95,37.82
  pour Bottom (no thermals): 36.77,48.84 35.88,50.16 36.35,50.48 36.88,49.69 37.5,49.57 37.61,49.41
VDD  (via drill 0.51, 0.7)
  Top 0.61: Q1.D v32.89,25.15 | v32.89,25.15 | Q2.D v36.96,25.15 | v36.96,25.15 | TETHER.3 TETHER.4 v29.84,26.42 | v29.84,26.42
  other vias: 25.4,23.75
  pour Route15 (isolate 0.254): 44.7,10.41 22.23,10.41 22.23,22.86 23.5,24.13 27.94,24.13 29.21,25.4 29.21,27.24 32.38,27.24 32.38,25.91 37.53,25.91 38.35,25.08 38.35,19.3 39.62,18.03 44.7,18.03
  pour Top (no thermals): 23.88,22.23 25.58,22.23 26.04,21.77 26.04,21.08 28.58,21.08 28.58,22.61 27.03,22.61 26.67,22.97 26.67,24 23.88,24
VREF_GX  (via drill 0.3)
  Top 0.152: v27.88,64.89 28.12,64.64 TP5.TP
  Bottom 0.152: U2.7 28.1,65.5 27.88,65.28 v27.88,64.89
VREF_GY  (via drill 0.3)
  Top 0.152: TP6.TP 36,64.64 v35.75,64.89
  Bottom 0.152: U3.7 35.97,65.5 35.75,65.28 v35.75,64.89
VREFZ
  Top 0.305: U1.7 41.91,23.05 RZ.1
VSS  (via drill 0.51, 0.7)
  Top 0.61: C23.1 v28.45,23.49 | C24.2 v27.3,17.14 | TETHER.6 TETHER.5 31.11,27.05 v31.75,26.42
  pour Route2 (isolate 0.254): 44.7,10.8 22.23,10.8 22.24,22.86 23.49,24.13 27.94,24.13 29.21,25.4 29.21,27.24 32.38,27.24 32.38,25.91 37.53,25.91 38.35,25.08 38.35,19.3 39.62,18.03 44.7,18.03
  pour Top (no thermals): 23.88,19.05 23.88,17.78 28.32,17.78 28.32,19.18 23.88,19.18
  pour Bottom (no thermals): 25.65,14.86 31.24,14.86 31.24,12.83 25.65,12.83
  pour Bottom (no thermals): 32.26,14.86 37.85,14.86 37.85,12.83 32.26,12.83
XOUT1
  Top 0.152: U4.XOUT 41.09,40.07 C3.2 40.4,40.77 AX.1
YOUT1
  Top 0.152: U4.YOUT 41.17,41.37 C9.2 38.62,41.52 AY.1
ZOUT1
  Top 0.152: U4.ZOUT 42.87,44.02 C13.2 39.24,44.07 AZ.1

## Text on the board
tPlace: 256 Channel / SPI Interface / with IMU and TFML / Rev 1.0 | CC BY-SA-NC-4.0 / JPN, MWL@MIT / 2016 | GND | LED | BAUX | AAUX | IMU | TRIG | B3 | B2 | GND | B1 | A3 | A2 | VCC | A1 | GND | VCC | VSS | GND | VDD
bPlace: LED / TRIG / to / AOUT | Cut to separate / IMU from / HSA AUX IN | 256 Channel SPI / Interface / Rev. 1.0 | CC BY-SA-NC-4.0 / JPN, MWL@MIT / 2016